# EAGLE board TOP_BEE_Brother_1.1v (EAGLE 6.5.0)
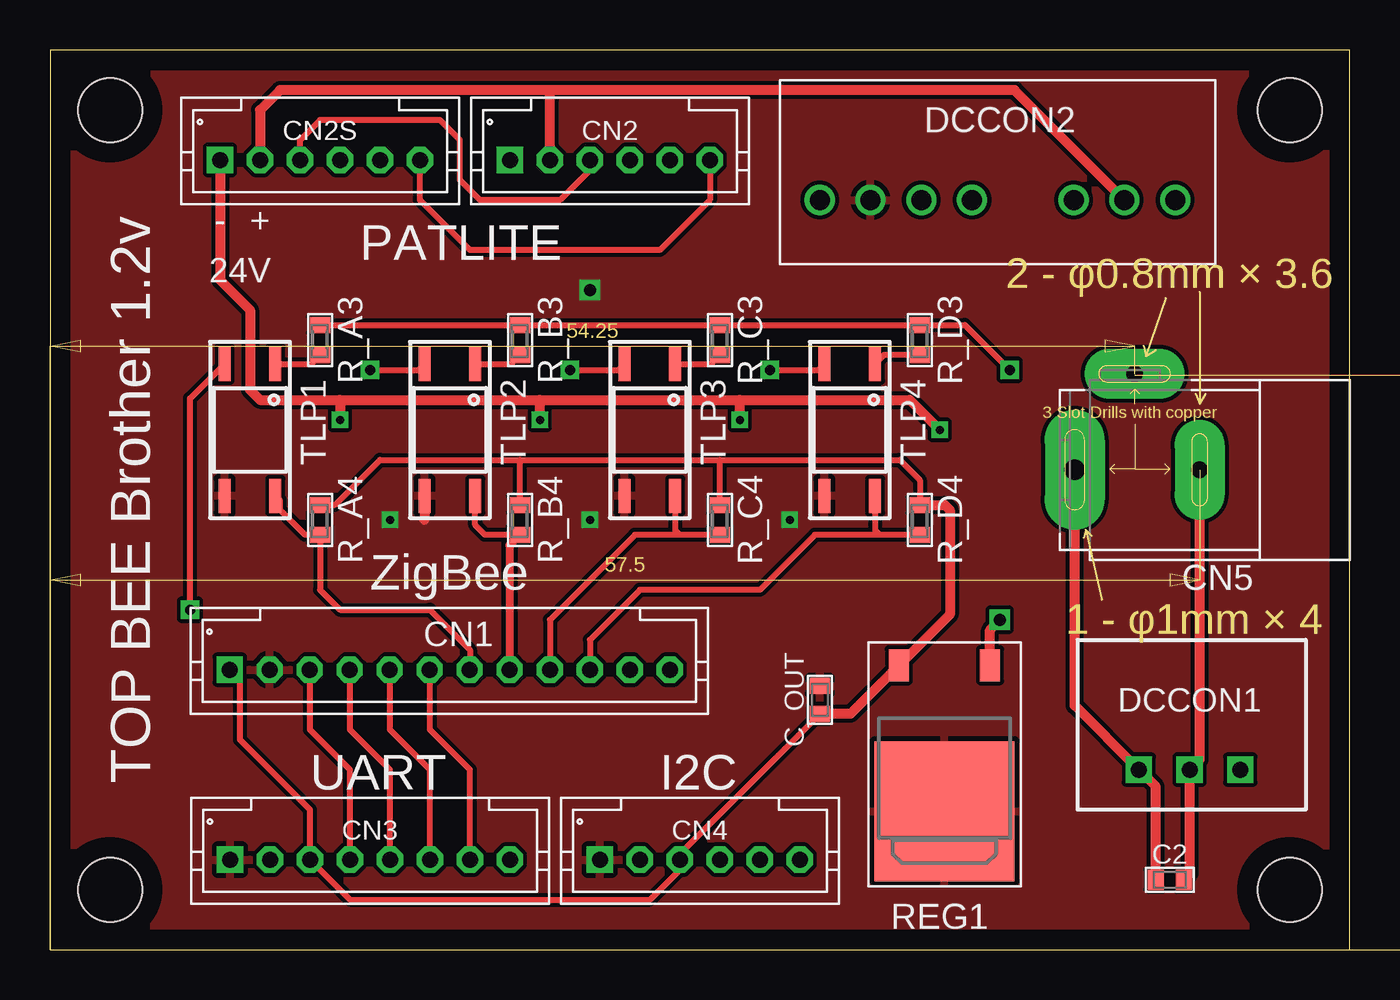
[diagram p0: board, top side]
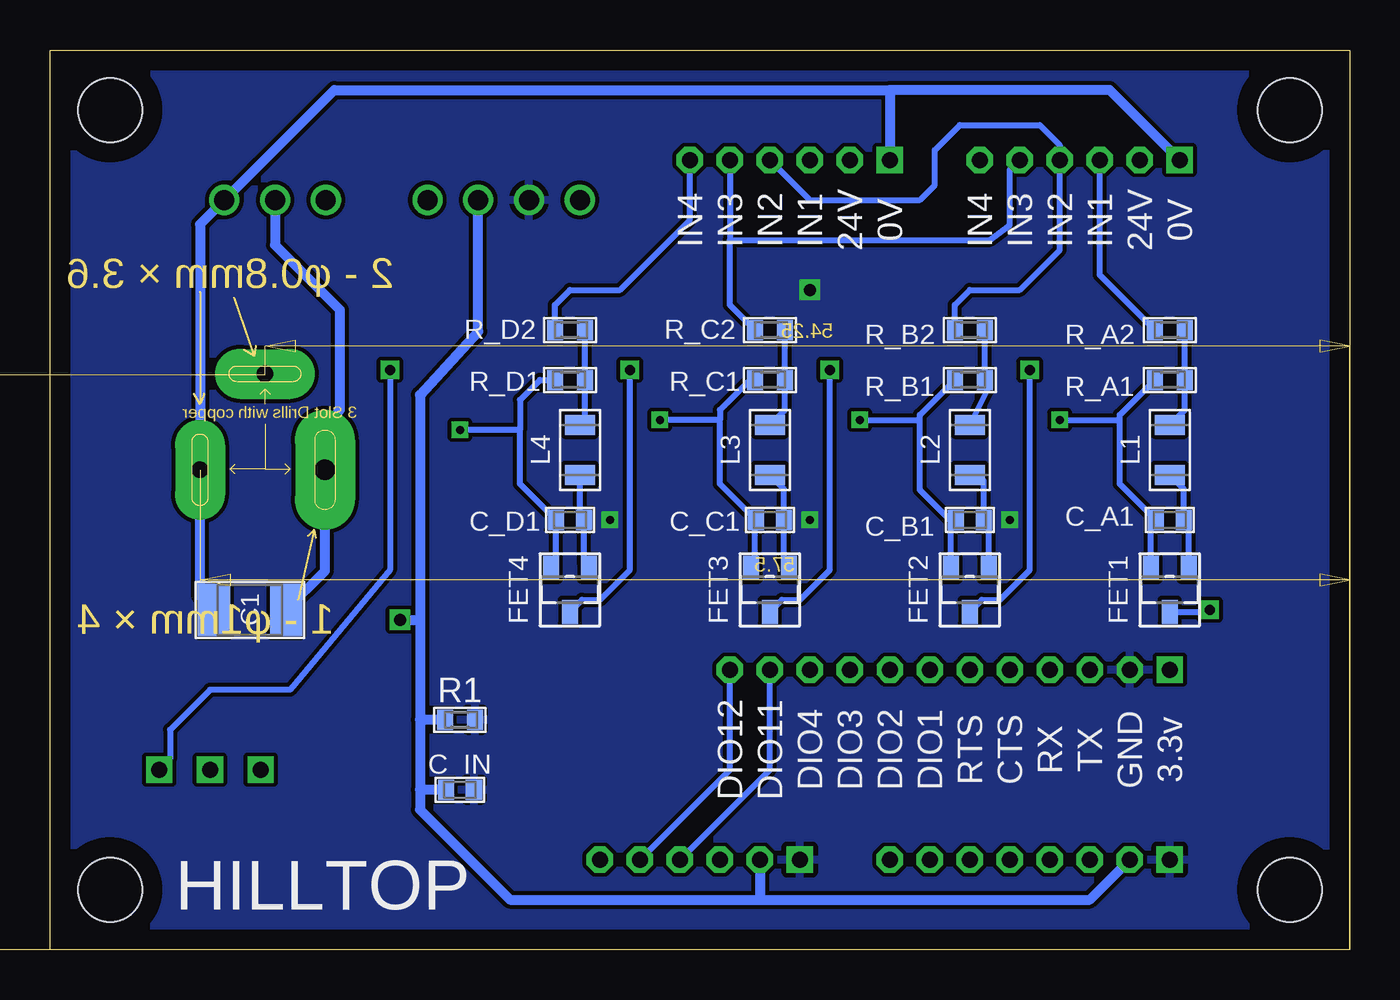
[diagram p1: board, bottom side, seen from below]

Size 65 x 45 mm. Coordinates in mm from the lower left corner, seen from the top.
Outline: 0,0 65,0 65,45 0,45 0,0
Copper layers (1*16): Top 0.035mm / dielectric 1.5mm / Bottom 0.035mm
Design rules "default *": minimum track width 10mil, minimum drill 0.4mm, track to track 8mil, track to pad 8mil, pad to pad 0.01mm, via to via 8mil, smd to smd 8mil, copper to edge 40mil, drill to drill 8mil, minimum pad ring 10mil, minimum via ring 8mil, stop-mask expansion 4mil, vias tented up to drill 0mil, thermal gap 10mil
Net classes: 0 default: width 0.2 mm; 2 10v: width 0.008 mm; 3 24vSig: clearance 0.4 mm to class 0
Holes 3.2 mm at 3,42 62,42 62,3 3,3
Milling: area 0,18.2 to 1.5,18.8; area 56,18.2 to 57.5,18.8; area 27.6,18.9 to 29.9,19.6; area 71.4,0 to 72,1.5; area 71.4,27.2 to 72,28.8; area 70.5,12.9 to 71.2,15.8; area 0,29.9 to 1.5,30.5; area 52.8,29.9 to 54.2,30.5; area 25.7,30.6 to 28.6,31.3; 18 lines

## Footprints (pad centres in the part's own frame; a part is rotated, then mirrored left to right if it is on the bottom)
3225 = smd 1.6 x 2.6: P$1 -1.8,0; P$2 1.8,0
1608 = smd 0.8 x 1: P$1 -0.7,0; P$2 0.7,0
JST-PA12 = drill 0.8 square: 1 0.015,0 | drill 0.8 octagon: 2 -1.985,0; 3 -3.985,0; 4 -5.985,0; 5 -7.985,0; 6 -9.985,0; 7 -11.985,0; 8 -13.985,0; 9 -16,0; 10 -18,0; 11 -20,0; 12 -22,0
JST-PA6 = drill 0.8 square: 1 5,0 | drill 0.8 octagon: 2 3,0; 3 1,0; 4 -1,0; 5 -3,0; 6 -5,0
JST-PA8 = drill 0.8 square: 1 7,0 | drill 0.8 octagon: 2 5,0; 3 3,0; 4 1,0; 5 -1,0; 6 -3,0; 7 -5,0; 8 -7,0
2DC-0005D = drill 1.001 pad 3 long: 1 6.25,0 | drill 0.801 pad 2.5 long: 2 0,0; 3 3.25,-4.8
Ｒ－７８Ｅ５．０ = drill 0.8 square: 1 -2.54,0; 2 0,0; 3 2.54,0
SIP8 = drill 1: 1 -17.78,0; 2 -15.24,0; 3 -12.7,0; 5 -7.62,0; 6 -5.08,0; 7 -2.54,0; 8 0,0
SOT23 = smd 0.8 x 1.2: 1 -0.95,-1.1; 2 0.95,-1.1; 3 0,1.1
TDK_NLV = smd 1 x 1.5: P$1 1.25,0; P$2 -1.25,0
1608' = smd 0.8 x 1: 1 -0.75,0; 2 0.75,0
TO252 = smd 1 x 1.6: 1 -2.52,-6.22; 3 2.04,-6.22 | smd 7 x 7: 2 -0.24,1.08
11−4C1 = smd 0.6 x 1.7: 1 -1.27,-3.3; 3 1.27,-3.3; 4 1.27,3.3; 6 -1.27,3.3

## Placement (x,y rotation side)
C1  [3225]  55,17 180 bottom
C2  [1608]  56,3.5 0 top
C_A1  [1608]  9,21.5 180 bottom
C_B1  [1608]  19,21.5 180 bottom
C_C1  [1608]  29,21.5 180 bottom
C_D1  [1608]  39,21.5 180 bottom
C_IN  [1608]  44.5,8 0 bottom
C_OUT  [1608]  38.5,12.5 90 top
CN1  JST-PA12  [JST-PA12]  9,14 180 top
CN2  JST-PA6  [JST-PA6]  28,39.5 180 top
CN2S  JST-PA6  [JST-PA6]  13.5,39.5 180 top
CN3  JST-PA8  [JST-PA8]  16,4.5 180 top
CN4  JST-PA6  [JST-PA6]  32.5,4.5 180 top
CN5  2DC-0005X  [2DC-0005D]  57.5,24 180 top
DCCON1  Ｒ－７８Ｅ５．０  [Ｒ－７８Ｅ５．０]  57,9 0 top
DCCON2  RS3  [SIP8]  38.5,37.5 180 top
DRILEGEND  [DRILEGEND]  -3.32,-18.1 0 top  (outside the outline)
FET1  2N7002K  [SOT23]  9,18 180 bottom
FET2  2N7002K  [SOT23]  19,18 180 bottom
FET3  2N7002K  [SOT23]  29,18 180 bottom
FET4  2N7002K  [SOT23]  39,18 180 bottom
L1  TDK_NLV25  [TDK_NLV]  9,25 90 bottom
L2  TDK_NLV25  [TDK_NLV]  19,25 90 bottom
L3  TDK_NLV25  [TDK_NLV]  29,25 90 bottom
L4  TDK_NLV25  [TDK_NLV]  38.5,25 90 bottom
R1  [1608']  44.5,11.5 180 bottom
R_A1  4.7K  [1608']  9,28.5 0 bottom
R_A2  10k  [1608']  9,31 180 bottom
R_A3  330  [1608']  13.5,30.5 90 top
R_A4  10k  [1608']  13.5,21.5 90 top
R_B1  4.7K  [1608']  19,28.5 0 bottom
R_B2  10K  [1608']  19,31 180 bottom
R_B3  330  [1608']  23.5,30.5 90 top
R_B4  10k  [1608']  23.5,21.5 90 top
R_C1  4.7K  [1608']  29,28.5 0 bottom
R_C2  10K  [1608']  29,31 180 bottom
R_C3  330  [1608']  33.5,30.5 90 top
R_C4  10k  [1608']  33.5,21.5 90 top
R_D1  4.7K  [1608']  39,28.5 0 bottom
R_D2  10K  [1608']  39,31 180 bottom
R_D3  330  [1608']  43.5,30.5 90 top
R_D4  10k  [1608']  43.5,21.5 90 top
REG1  NJM2845  [TO252]  44.5,8 180 top
TLP1  TLP124  [11−4C1]  10,26 180 top
TLP2  TLP124  [11−4C1]  20,26 180 top
TLP3  TLP124  [11−4C1]  30,26 180 top
TLP4  TLP124  [11−4C1]  40,26 180 top

## Library data of the parts
C1 C2 C_A1 C_B1 C_C1 C_D1 C_IN C_OUT = 02_C
CN1 CN2 CN2S CN3 CN4 = jst-ph
CN5 = marushin
DCCON1 DCCON2 REG1 TLP1-TLP4 = 04_IC
DRILEGEND = drilegend
FET1-FET4 = 06_FET
L1-L4 = 03_L
R1 R_A1-R_A4 R_B1-R_B4 R_C1-R_C4 R_D1-R_D4 = 01_R

## Nets
2N7002K: L1.P$1 R_A1.2 R_A2.1
+3.3V: C_OUT.P$1 CN1.1 CN3.3 CN4.3 R_A4.2 R_B4.2 R_C4.2 R_D4.2 REG1.3
+5V: C_IN.P$1 CN3.2 CN4.2 DCCON2.6 R1.2 REG1.1
+24V [24v]: C1.P$1 C2.P$1 CN2.2 CN2S.2 CN5.1 DCCON1.1 DCCON2.2
CTS: CN1.5 CN3.6
DIO1: CN1.7 R_A4.1 TLP1.6
DIO2: CN1.8 R_B4.1 TLP2.6
DIO3: CN1.9 R_C4.1 TLP3.6
DIO4: CN1.10 R_D4.1 TLP4.6
DIO11: CN1.11 CN4.4
DIO12: CN1.12 CN4.5
GND: C_IN.P$2 C_OUT.P$2 CN1.2 CN3.1 CN4.1 DCCON2.7 R1.1 REG1.2 TLP1.4 TLP2.4 TLP3.4 TLP4.4
GND2 [24v]: C1.P$2 C2.P$2 C_A1.P$2 C_B1.P$2 C_C1.P$2 C_D1.P$2 CN2.1 CN2S.1 CN5.2 DCCON1.2 DCCON2.1 FET1.2 FET2.2 FET3.2 FET4.2 R_A1.1 R_B1.1 R_C1.1 R_D1.1
INPUT1 [24vSig]: CN2.3 CN2S.3 R_A2.2
INPUT2 [24vSig]: CN2.4 CN2S.4 R_B2.2
INPUT3 [24vSig]: CN2.5 CN2S.5 R_C2.2
INPUT4 [24vSig]: CN2.6 CN2S.6 R_D2.2
N$1: FET2.3 TLP2.3
N$2: FET1.3 TLP1.3
N$3: R_A3.1 TLP1.1
N$4: FET4.3 TLP4.3
N$5: R_B3.1 TLP2.1
N$6: L2.P$1 R_B1.2 R_B2.1
N$7: FET3.3 TLP3.3
N$8: R_C3.1 TLP3.1
N$9: L3.P$1 R_C1.2 R_C2.1
N$10: R_D3.1 TLP4.1
N$11: L4.P$1 R_D1.2 R_D2.1
N$12: C_A1.P$1 FET1.1 L1.P$2
N$13: C_B1.P$1 FET2.1 L2.P$2
N$14: C_C1.P$1 FET3.1 L3.P$2
N$15: C_D1.P$1 FET4.1 L4.P$2
NC1: CN3.8
RTS: CN1.6 CN3.7
RX: CN1.4 CN3.5
TX: CN1.3 CN3.4
V2: DCCON1.3 R_A3.2 R_B3.2 R_C3.2 R_D3.2

## Tracks (layer width: path | path; a pad name or v marks a point on that pad's centre or on a via)
2N7002K
  Bottom 0.3: L1.P$1 8.25,27 R_A1.2 R_A2.1
+3.3V
  Top 0.3: R_A4.2 14.25,22.25 16.5,24.5 23.5,24.5 | R_D4.2 43.5,23.5 42.5,24.5 33.5,24.5 | CN1.1 9.5,13.48 9.5,10.5 13,7 CN3.3 15,2.5 30,2.5 31.5,4 CN4.3 31.5,4.8 C_OUT.P$1 | 23.5,24.5 33.5,24.5 | R_C4.2 33.5,24.5 | R_B4.2 23.5,24.5
  Top 0.5: C_OUT.P$1 40.04,11.8 REG1.3 45,16.76 45,22 44.75,22.25 R_D4.2
+5V  (via drill 0.6)
  Top 0.5: REG1.1 47.02,15.98 v47.5,16.5
  Bottom 0.5: 46.5,16.5 46.5,27.75 43.58,30.92 DCCON2.6 | v47.5,16.5 46.5,16.5 | 46.5,16.5 46.5,11.5 | 46.5,11.5 46.5,8 | 46.5,8 46.5,7 42,2.5 29.5,2.5 | 29.5,2.5 13,2.5 CN3.2 | CN4.2 29.5,2.5 | R1.2 46.5,11.5 | C_IN.P$1 46.5,8
+24V
  Top 0.5: CN5.1 51.25,12.21 DCCON1.1 55.3,8.16 C2.P$1 | DCCON2.2 48.24,43 25,43 | 25,43 11.5,43 10.5,42 CN2S.2 | CN2.2 25,43
  Bottom 0.5: C1.P$1 51.25,18.95 CN5.1 51.25,26.25 50.5,27 50.5,32 53.74,35.24 DCCON2.2
CTS
  Top 0.3: CN3.6 19,9 17,11 17,13.98 CN1.5
DIO1
  Top 0.3: TLP1.6 11.5,22.47 11.5,22 12.75,20.75 R_A4.1 13.5,18 14.5,17 19,17 21,15 21,14.02 CN1.7
DIO2
  Top 0.3: R_B4.1 21.75,20.75 21.27,21.23 TLP2.6
  Top 0.406: R_B4.1 22.98,20.23 CN1.8
DIO3
  Top 0.3: R_C4.1 31.5,20.75 | 31.5,20.75 29.25,20.75 25,16.5 25,14.11 CN1.9 | TLP3.6 31.27,20.98 31.5,20.75
DIO4
  Top 0.3: R_D4.1 41.5,20.75 | 41.5,20.75 38.25,20.75 35.5,18 29.5,18 27,15.5 27,14.21 CN1.10 | TLP4.6 41.27,20.98 41.5,20.75
DIO11
  Bottom 0.3: CN4.4 29,9 CN1.11
DIO12
  Bottom 0.3: CN4.5 31,9 CN1.12
GND  (via drill 0.4, 0.6)
  Top 0.5: TLP2.4 18.73,21.5
  other vias: 37,21.5 27,21.5 17,21.5 27,33
  pour Top: 0,45 65,45 65,0 0,0
  pour Bottom: 0,45 65,45 65,0 0,0
GND2  (via drill 0.4)
  Top 0.5: CN5.2 57.5,9.5 DCCON1.2 57,3.8 C2.P$2 | CN2S.1 8.5,33.5 10,32 10,28 10.5,27.5 14.5,27.5 | 14.5,27.5 24.5,27.5 | 24.5,27.5 34.5,27.5 | 34.5,27.5 43,27.5 v44.5,26 | v24.5,26.5 24.5,27.5 | v34.5,26.5 34.5,27.5 | 14.5,27.5 v14.5,26.5
  Bottom 0.3: FET3.2 29.75,19.1 29.75,21.45 C_C1.P$2 31.5,23.3 31.5,26.5 | FET2.2 19.95,21.25 C_B1.P$2 20,21.5 21.5,23 21.5,26.5 | FET1.2 9.95,21.25 C_A1.P$2 11.5,23.3 11.5,26.5 | 11.5,26.5 11.5,26.75 R_A1.1 | v14.5,26.5 11.5,26.5 | 21.5,26.5 21.5,26.75 R_B1.1 | v24.5,26.5 21.5,26.5 | R_C1.1 30,28.5 31.5,27 31.5,26.5 | 31.5,26.5 v34.5,26.5 | 41.5,26 41.5,23.3 C_D1.P$2 39.7,19.35 FET4.2 | R_D1.1 40.5,28.5 41.5,27.5 41.5,26 | 41.5,26 v44.5,26
  Bottom 0.5: C1.P$2 57.5,17.7 CN5.2 57.5,36.28 DCCON2.1 50.78,43 23,43 | 23,43 CN2.1 | CN2S.1 12,43 23,43
INPUT1
  Top 0.3: CN2.3 27,39 25.5,37.5 21.5,37.5 20.5,38.5 20.5,40.5 19.5,41.5 13.5,41.5 12.5,40.5 CN2S.3
  Bottom 0.3: R_A2.2 12.5,33.75 CN2S.3
INPUT2
  Bottom 0.3: R_B2.2 19.75,32.25 19,33 16.5,33 14.5,35 CN2S.4 14.5,40.25 15.5,41.25 19.5,41.25 20.75,40 20.75,38.25 21.5,37.5 27,37.5 CN2.4
INPUT3
  Bottom 0.3: R_C2.2 31,32.25 31,35.5 | CN2.5 31,35.5 | 31,35.5 18,35.5 17,36.25 17,39 CN2S.5
INPUT4
  Top 0.3: CN2.6 33,37.5 30.5,35 21,35 18.5,37.5 CN2S.6
  Bottom 0.3: R_D2.2 39.75,32.25 39,33 36.5,33 33,36.5 CN2.6
N$1  (via drill 0.5)
  Top 0.3: 18.73,29.23 TLP2.3 18.43,29 v16,29
  Bottom 0.3: FET2.3 18.4,17.5 17.5,17.5 16,19 v16,29
N$2  (via drill 0.5)
  Top 0.3: v7,17 7,27.57 TLP1.3
  Bottom 0.3: FET1.3 7.1,16.9 v7,17
N$3
  Top 0.3: TLP1.1 13.05,29.3 R_A3.1
N$4  (via drill 0.5)
  Top 0.3: 38.73,29.23 TLP4.3 38.43,29 v36,29
  Bottom 0.3: FET4.3 38.4,17.5 37.5,17.5 36,19 v36,29
N$5
  Top 0.3: TLP2.1 23.05,29.3 R_B3.1
N$6
  Bottom 0.3: L2.P$1 18,28.25 R_B1.2 R_B2.1
N$7  (via drill 0.5)
  Top 0.3: 28.73,29.23 TLP3.3 28.43,29 v26,29
  Bottom 0.3: FET3.3 28.4,17.5 27.5,17.5 26,19 v26,29
N$8
  Top 0.3: TLP3.1 33.05,29.3 R_C3.1
N$9
  Bottom 0.3: L3.P$1 28.25,27 R_C1.2 R_C2.1
N$10
  Top 0.3: R_D3.1 41.72,29.75 TLP4.1
N$11
  Bottom 0.3: L4.P$1 38.25,26.5 R_D1.2 R_D2.1
N$12
  Bottom 0.3: FET1.1 8.05,21.25 C_A1.P$1 8.3,23.05 L1.P$2
N$13
  Bottom 0.3: FET2.1 18.05,21.25 C_B1.P$1 18.3,23.45 L2.P$2
N$14
  Bottom 0.3: FET3.1 28.3,19.35 C_C1.P$1 28.3,23.05 L3.P$2
N$15
  Bottom 0.3: FET4.1 38.3,19.35 C_D1.P$1 38.5,21.7 L4.P$2
RTS
  Top 0.3: CN3.7 21,9 19,11 19,13.98 CN1.6
RX
  Top 0.3: CN3.5 17,9 15,11 15,13.98 CN1.4
TX
  Top 0.3: CN3.4 15,9 13,11 13,13.98 CN1.3
V2  (via drill 0.5)
  Top 0.3: R_A3.2 R_B3.2 R_C3.2 R_D3.2 45.75,31.25 v48,29
  Bottom 0.3: DCCON1.3 59,9.54 59,11 57,13 53,13 48,19 v48,29

## Text on the board
tPlace: - | + | 24V | PATLITE | TOP BEE Brother 1.2v | ZigBee | UART | I2C
bPlace: 0V | 24V | IN1 | IN2 | IN3 | IN4 | 0V | 24V | IN1 | IN2 | IN3 | IN4 | 3.3v | GND | TX | RX | CTS | RTS | DIO1 | DIO2 | DIO3 | DIO4 | DIO11 | DIO12 | HILLTOP
Milling: 2 - φ0.8mm × 3.6 | 1 - φ1mm × 4
DrillLegend_01-20: 穴図